# Altium PCB PCB_Radio.PcbDoc
Units mil, origin at the board's own origin, x right, y up, seen from the top; angles counter-clockwise.
Board outline 1520 x 1095 mil, 2 copper layers (Top Layer, Bottom Layer); 41 components, 38 nets, 138 pads, 117 vias.
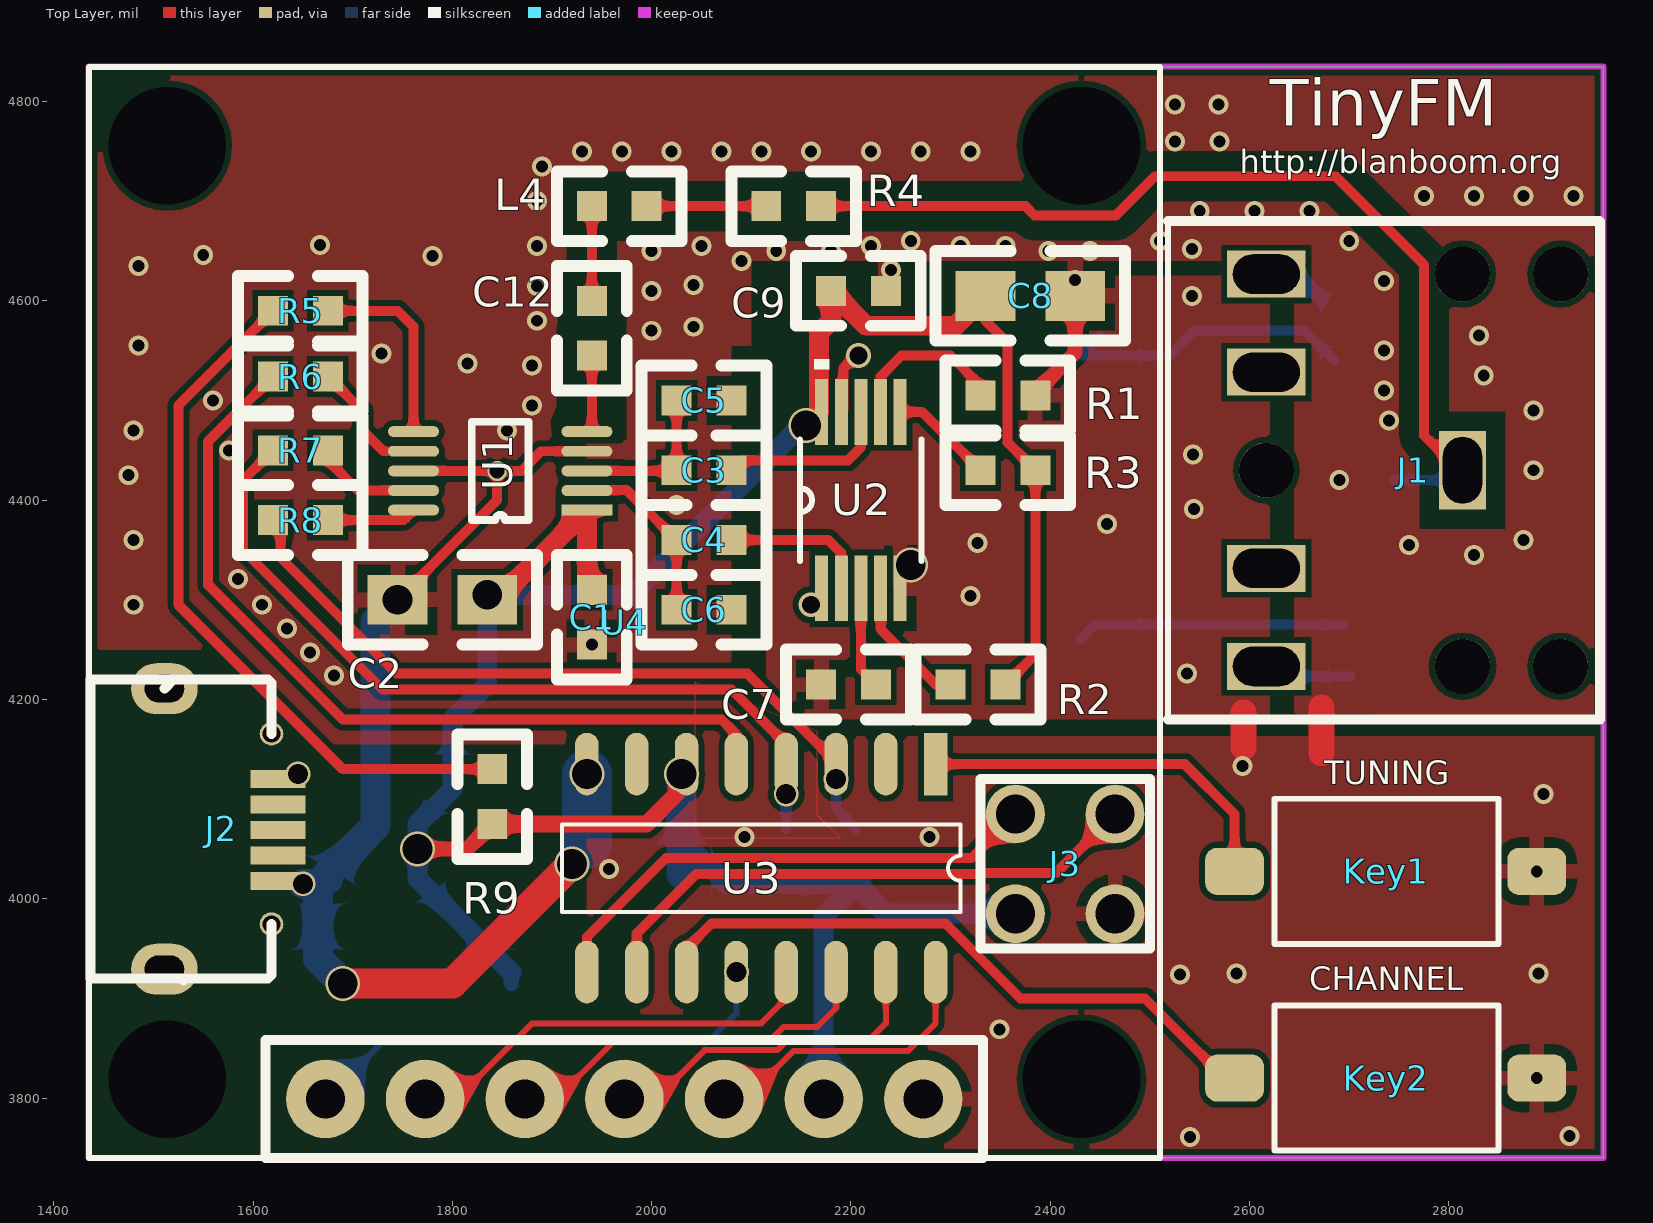
[diagram p0: Top Layer view]
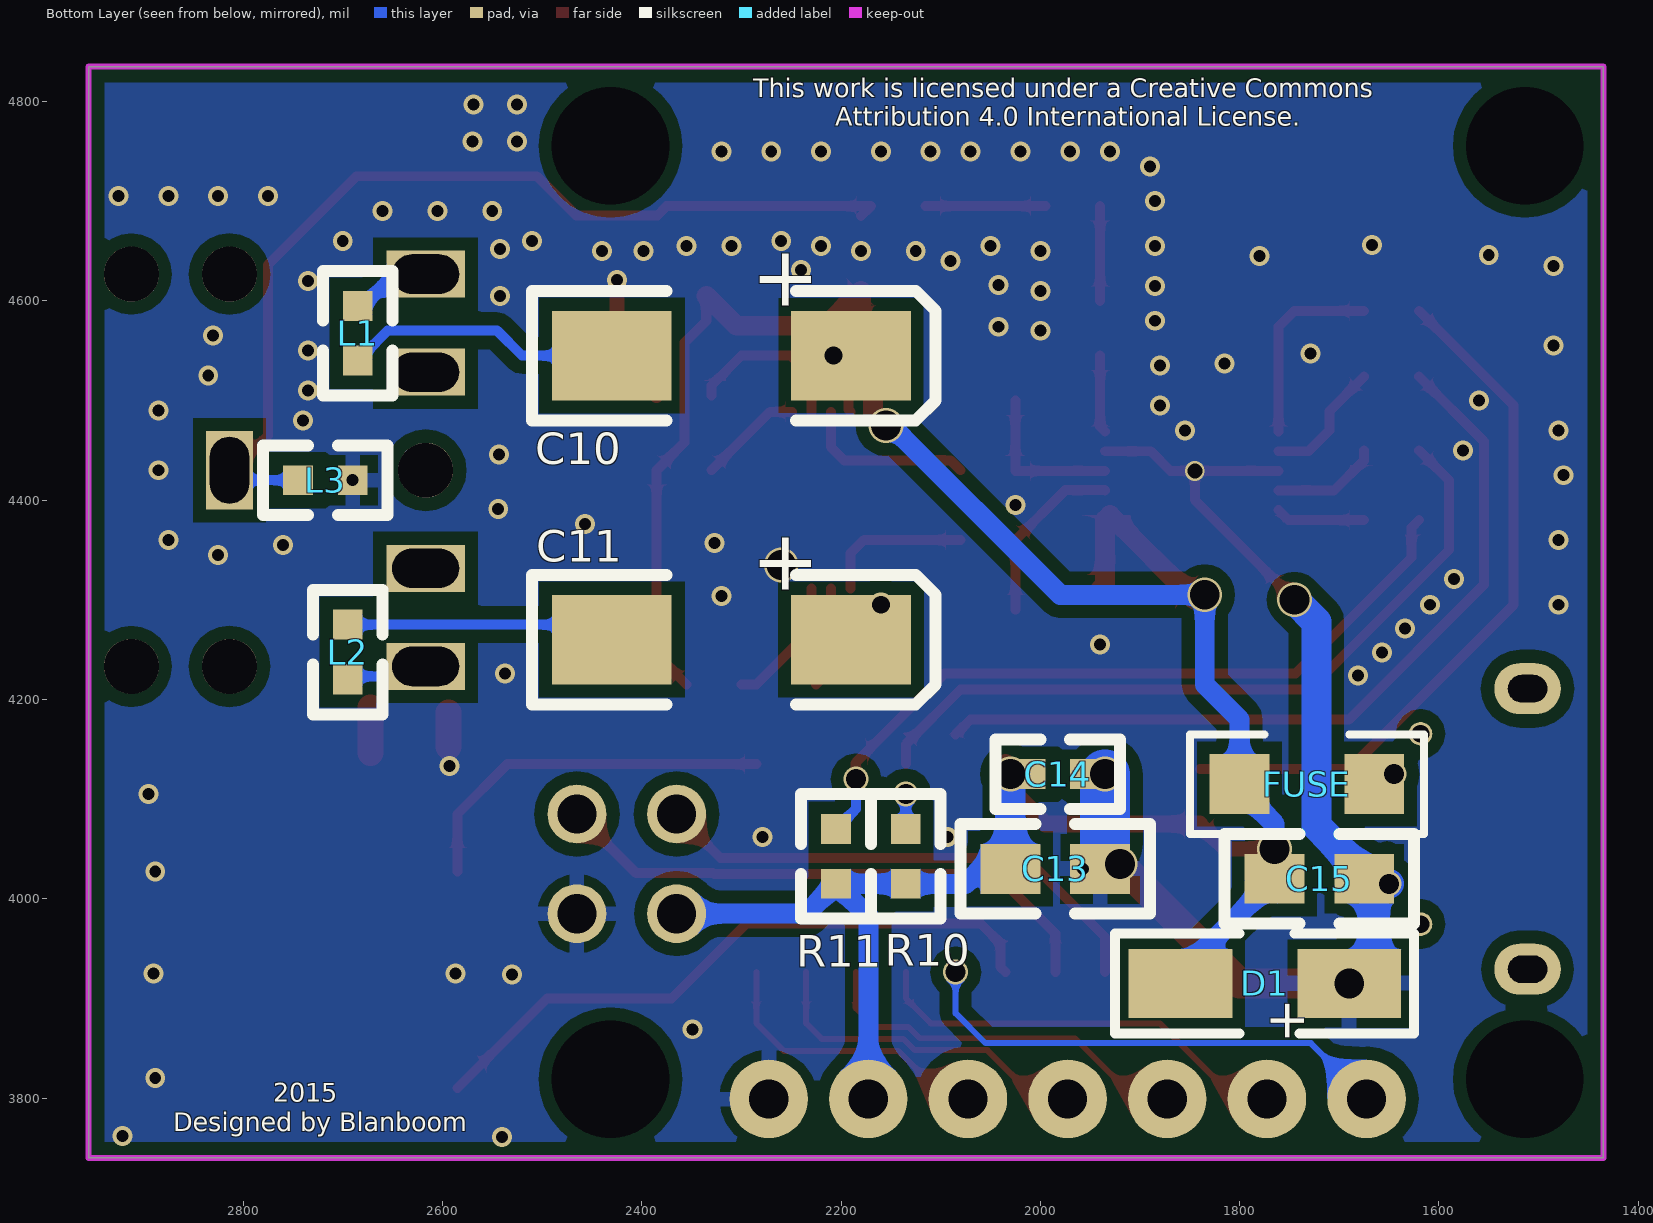
[diagram p1: Bottom Layer view, seen from below]

## Layer stack, top to bottom
Top Solder: solder mask 0.4, Solder Resist, Dk 3.5
Top Layer: signal copper 1.4
Dielectric 1: dielectric 12.6, FR-4, Dk 4.8
Bottom Layer: signal copper 1.4
Bottom Solder: solder mask 0.4, Solder Resist, Dk 3.5

## Board outline
1435,3740 2955,3740 2955,4835 1435,4835

## Design rules (kind name [scope] priority, off if disabled: settings)
Clearance Clearance_Bottom_Poly [(OnLayer('Bottom Layer') AND InNet('GND'))] p1: gap=13
Clearance Clearance_ant [(InNet('NetJ1_1') OR InNet('NetL4_2') OR InNet('NetC12_1')) vs InNet('GND')] p2: gap=20
Clearance [All] p3: gap=6
ComponentClearance [All] p1: gap=0 collisioncheckmode=3 verticalgap=0 showdistances=FALSE
PolygonConnect PolygonConnect_GND_Via [isvia] p1: connectstyle=Direct reliefconductorwidth=10 reliefentries=4 polygonreliefangle="90 Angle" airgapwidth=10
PolygonConnect [All] p2: connectstyle=Relief reliefconductorwidth=15 reliefentries=4 polygonreliefangle="90 Angle" airgapwidth=10
RoutingVias [All] p1: holewidth=28 width=50 viastyle="Through Hole" minholewidth=28 minwidth=50 maxholewidth=28 maxwidth=50
SolderMaskExpansion [All] p1: expansion=4
UnpouredPolygon [All] p1: allowunpoured=FALSE
Width [All] p1: maxlimit=100 minlimit=6 preferedwidth=10 minimp=50.000000 maximp=50.000000 favimp=50.000000
28 further rules are at their usual default settings.

## Components (designator, comment, footprint, x,y, rotation, side; value= is the part's Value field where it differs from the comment)
C1 "Cap" 0603 1940,4255 r90 top
C2 "Cap" 0805 1745,4300 r0 top
C3 "Cap" 0603 2025,4430 r0 top
C4 "Cap" 0603 2025,4360 r0 top
C5 "Cap" 0603 2080,4500 r180 top
C6 "Cap" 0603 2080,4290 r180 top
C7 "Cap" 0603 2225,4215 r180 top
C8 "Cap" 0805 2335,4605 r0 top
C9 "Cap" 0603 2180,4610 r0 top
C10 "Cap Pol2" 6032 2190,4545 r180 bottom
C11 "Cap Pol2" 6032 2190,4260 r180 bottom
C12 "Cap" 0603 1940,4600 r270 top
C13 "Cap" 0805 2030,4030 r180 bottom
C14 "Cap" 0603 2010,4125 r180 bottom
C15 "Cap" 0805 1675,4020 r0 bottom
D1 "M7" DO-214AC 1690,3915 r0 bottom
FUSE "1A 1206" 1206 1800,4115 r180 bottom
J1 "PHONEJACK 3F07" 3F07 2616.81,4430 r180 top locked
J2 "MicroUSB" MicroUSB 1635,4120 r270 top
J3 "Header4" HEADER4 2465,3985 r180 top
Key1 "Key" KEY 2585,4027.5 r0 top
Key2 "Key" KEY 2585,3820 r0 top
L1 "Inductor" 0603 2685,4540 r90 bottom
L2 "Inductor" 0603 2695,4275 r270 bottom
L3 "Inductor" 0603 2745,4420 r180 bottom
L4 "Inductor" 0603 1940,4695 r0 top
R1 "Res2" 0603 2385,4505 r180 top
R2 "Res2" 0603 2355,4215 r180 top
R3 "Res2" 0603 2385,4430 r180 top
R4 "Res2" 0603 2170,4695 r180 top
R5 "Res2" 0603 1675,4590 r180 top
R6 "Res2" 0603 1675,4524.06 r180 top
R7 "Res2" 0603 1675,4450 r180 top
R8 "Res2" 0603 1675,4380 r180 top
R9 "Res2" 0603 1840,4075 r90 top
R10 "Res2" 0603 2135,4015 r90 bottom
R11 "Res2" 0603 2205,4015 r90 bottom
U1 "QN8035" SOP10 1935,4390 r180 top
U2 "LM4811MM/NOPB" MUB10Am 2210,4400 r90 top
U3 "STC15W201S_SOP16_DIP16" SOP16 2285,4135 r270 top
U4 "OLED" OLED_0.96 2510,3740 r180 top locked

## Footprints (in the part's own frame and the unit in brackets; to place one, negate y for a bottom-side part, rotate by r counter-clockwise, add the part's x,y. Pads: shape width x height; smd on the part's side, far side on the other; paste and mask are expansions set on the pad)
3F07 [mm]
  round 1.4 hole 1.4: 0(-7.5,-5) 0(-7.5,5) 0(-5,5) 0(-5,-5) 0(0,0)
  rect 1.2x2 hole 1 slot 1.7 at 90 deg: 1(-5,0)
  rect 2x1.2 hole 1 slot 1.7 at 0 deg: 2(0,5) 3(0,2.5) 4(0,-2.5) 5(0,-5)
  silkscreen extent -8.51,-6.35 2.51,6.35
0603 [mil]
  rect 30x30 smd: 1(0,0) 2(55,0)
  silkscreen extent -35,-35 90,35
0805 [mil]
  rect 60x50 smd: 1(0,0) 2(90,0)
  silkscreen extent -50,-45 140,45
1206 [mil]
  rect 60x60 smd: 1(0,0) 2(135,0)
  silkscreen extent -50,-50 185,50
6032 [mil]
  rect 120x90 smd: 1(0,0) 2(-240,0)
  silkscreen extent -320,-65 85,65
DO-214AC [mm]
  rect 2.65x1.75 smd: 1(4.3,0) 3(0,0)
  silkscreen extent -1.65,-1.27 5.97,1.27
HEADER4 [mm]
  round 1.5 hole 1: 1(0,0) 2(2.54,0) 3(2.54,-2.54) 4(0,-2.54)
  silkscreen extent -0.89,-3.43 3.43,0.89
KEY [mm]
  rrect50% 1.5x1.2 smd: 1(0,0) 2(7.7,0)
  silkscreen extent 1.02,-1.85 6.73,1.85
MicroUSB [mm]
  rect 0.457x1.397 smd: 1(2.6,-0.254) 2(1.95,-0.254) 3(1.3,-0.254) 4(0.65,-0.254) 5(0,-0.254)
  round 0.6 hole 0.45: 5_2(-1.155,-0.42) 6(3.695,-0.42)
  oval 1.3x1.7 hole 0.7 slot 1 at 90 deg: 7(-2.305,-3.15) 8(4.845,-3.15)
  silkscreen extent -2.54,-5.03 5.13,-0.42
MUB10Am [mil]
  rect 66x13 smd: 1(-88.5,39.37) 2(-88.5,19.68) 3(-88.5,0) 4(-88.5,-19.68) 5(-88.5,-39.37) 6(88.5,-39.37) 7(88.5,-19.68) 8(88.5,0) 9(88.5,19.68) 10(88.5,39.37)
  silkscreen extent -61,-61 142,61
OLED_0.96 [mm]
  round 0 hole 3: 0(2,-2) 0(2,-25.8) 0(25.3,-2) 0(25.3,-25.8)
  round 2 hole 1: 1(6.03,-1.5) 2(8.57,-1.5) 3(11.11,-1.5) 4(13.65,-1.5) 5(16.19,-1.5) 6(18.73,-1.5) 7(21.27,-1.5)
  silkscreen extent 0,-27.8 27.3,0
SOP10 [mm]
  rect 1.3x0.28 smd: 1(0,0)
  oval 1.3x0.28 smd: 2(0,-0.5) 3(0,-1) 4(0,-1.5) 5(0,-2) 6(4.42,-2) 7(4.42,-1.5) 8(4.42,-1) 9(4.42,-0.5) 10(4.42,0)
  silkscreen extent 1.48,-2.25 2.94,0.25
SOP16 [mm]
  rect 1.6x0.6 smd: 1(0,0)
  oval 1.6x0.6 smd: 2(0,-1.27) 3(0,-2.54) 4(0,-3.81) 5(0,-5.08) 6(0,-6.35) 7(0,-7.62) 8(0,-8.89) 9(5.3,-8.89) 10(5.3,-7.62) 11(5.3,-6.35) 12(5.3,-5.08) 13(5.3,-3.81) 14(5.3,-2.54) 15(5.3,-1.27) 16(5.3,0)
  silkscreen extent 1.53,-9.53 3.77,0.64

## Part data
C1 C2 C3 C4 C5 C6 C7 C8 C9 C12 C13 C14 C15: "Capacitor"
C10 C11: "Polarized Capacitor (Axial)"
D1: library part Diode, "Default Diode"
FUSE: library part "Fuse 1", "Fuse"
J1: library part "PHONEJACK STEREO SW"
J2 U2: "Imported"
R1 R2 R3 R4 R5 R6 R7 R8 R9 R10 R11: "Resistor"

## Via types
v1: diameter 20, hole 12, Top Layer to Bottom Layer, 100 vias
v2: diameter 35, hole 30, Top Layer to Bottom Layer, 9 vias
v3: diameter 25, hole 20, Top Layer to Bottom Layer, 5 vias
v4: diameter 25, hole 18, Top Layer to Bottom Layer, 2 vias
v5: diameter 20, hole 15, Top Layer to Bottom Layer, 1 vias

## Nets (pads, with @x,y where several pads share a name; then routed paths per layer and width w, separated by ;. In a path a pad name is that pad's centre, name@x,y a point inside that pad or via, vN(x,y) a via of type N, cw(c..) or ccw(c..) an arc to the next point about the centre after c; other vN are vias at no path point)
CLK: R6.2 U3.5 | length 828.1
  Top Layer w10: R6.2 1555,4459.06 1555,4315 1690,4180 2070,4180 U3.5@2085,4165
GND: C1.1 C2.1 C5.1 C6.1 C7.2 C8.2 C9.2 C13.2 C14.2 C15.1 D1.3 J2.1 J3.1 Key1.2 Key2.2 L3.2 R1.1 U1.4 U1.8 U2.5 U3.8 U4.1 | length 1317.5
  Top Layer w10: v2(1745,4300) 1845,4400 v5(1845,4429.37) ; U1.8 v5(1845,4429.37) ; U1.4 1889.06,4449.06 1869.37,4429.37 v5(1845,4429.37)
  Top Layer w15: R1.1 2385,4508 2425,4548 C8.2
  Top Layer w26: 2594,4152 2594,4187 ; 2672,4146 2672,4192
  Top Layer w30: v2(1690,3915) 1800,3915 v2(1920,4035)
  Bottom Layer w30: v3(1650,4015) 1660,4015 1665,4010 1665,3940 D1.3@1680,3925 ; C15.1 1675,4025.4 1723,4073.4 1723,4278 v2(1745,4300)
  Bottom Layer w50: 1935,4055 v2(1935,4125)
  other v1: 2540,3761 2921,3762 2888.15,3820 2349,3869 2530,3924 2587,3925 2890,3925 2888.15,4027.5 1957,4030 2093,4062 2279,4062 2895,4105 2593,4133 1681,4224 2537,4226 1657,4247 1940,4255 1634,4271 1480,4295 1609,4295 2320,4304 1585,4321 2825,4345 2760,4355 2327,4357 1480,4360 2875,4360 2457,4376 2544,4391 2025,4395 2690,4420 1475,4425 2885,4430 2543,4446 1576,4450 1480,4470 1855,4470 2740,4480 2885,4490 1880,4495 1560,4500 2735,4510 2835,4525 1880,4535 1815,4537 1729,4547 2735,4550 1485,4555 2830,4565 2000,4570 2042,4574 1885,4580 2542,4605 2000,4610 1885,4615 2042,4616 2735,4620 2425,4621 2240,4631 1485,4635 2090,4640 1780,4645 1550,4646 2000,4650 2125,4650 2180,4650 2398,4650 2440,4650 2542,4652 1885,4655 2050,4655 2220,4655 2310,4655 2355,4655 1667,4656 2260,4660 2510,4660 2700,4660 2550,4690 2605,4690 2660,4690 1885,4700 2775,4705 2825,4705 2875,4705 2925,4705 1890,4735 1930,4750 1970,4750 2020,4750 2070,4750 2110,4750 2160,4750 2220,4750 2270,4750 2320,4750 2525,4760 2570,4760 2525,4797 2569,4797
  other v2: 2260,4335
INT: R5.2 R9.2 | length 717.7
  Top Layer w10: R5.2 1525,4495 1525,4295 1690,4130 R9.2
KEY1: Key1.1 U3.1 | length 378.2
  Top Layer w10: U3.1 2535,4135 2585,4085 Key1.1
KEY2: Key2.1 U3.11 | length 652.4
  Top Layer w10: U3.11 2040,3931.34 2040,3955 2060,3975 2295,3975 2370,3900 2495,3900 Key2.1@2585,3810
NetC3_1: C3.1 C5.2 U1.3 | length 160
  Top Layer w10: U1.3 C3.1@2025,4429.37 ; C3.1 C5.2
NetC3_2: C3.2 U2.8 | length 175
  Top Layer w10: C3.2 2090,4440 2196.87,4440 2210,4453.13 U2.8
NetC4_1: C4.1 C6.2 U1.2 | length 180.8
  Top Layer w10: U1.2 1935.32,4410 1975,4410 C4.1 C6.2
NetC4_2: C4.2 U2.2 | length 151.1
  Top Layer w10: C4.2 2177.19,4360 2190.32,4346.87 U2.2
NetC7_1: C7.1 U2.3 | length 102.7
  Top Layer w10: U2.3 2210,4230 C7.1
NetC10_1: C10.1 U2.9 | length 65.1
  Top Layer w10: U2.9 2192.5,4490.69 2192.5,4532.5 2205,4545 v4(2207.5,4545)
NetC10_2: C10.2 L1.1 | length 306.1
  Bottom Layer w10: C10.2@2450,4565 C10.2 2520,4545 2545,4570 2655,4570 L1.1
NetC11_1: C11.1 U2.1
  other v4: 2160,4295
NetC11_2: C11.2 L2.1 | length 271.2
  Bottom Layer w10: C11.2 2445,4275 L2.1
NetC12_1: C12.1 L4.1 | length 95
  Top Layer w10: C12.1 L4.1
NetC12_2: C12.2 U1.5 | length 78.3
  Top Layer w10: U1.5 1940,4473.74 C12.2
NetFUSE_2: FUSE.2 J2.5
  other v3: 1645,4125
NetJ1_1: J1.1 L3.1 R4.1 | length 974.4
  Top Layer w10: R4.1@2180,4685 R4.1 2375,4695 2384.31,4685.69 2465.69,4685.69 2505,4725 2686.24,4725 2775.1,4636.14 2775.1,4464.9 2811.85,4428.15 J1.1@2811.85,4420
  Bottom Layer w10: L3.1 J1.1@2811.85,4420
NetJ1_2: J1.2 L2.2 | length 86.9
  Bottom Layer w10: J1.2@2615,4223.15 L2.2@2701.85,4223.15
NetJ1_5: J1.5 L1.2 | length 65.8
  Bottom Layer w13: J1.5 2648.15,4626.85 L1.2@2672.5,4602.5
NetL4_2: L4.2 R4.2 | length 120
  Top Layer w10: L4.2 R4.2
NetR1_2: R1.2 U2.7 | length 166.9
  Top Layer w10: U2.7 2229.68,4523.87 2250.81,4545 2300,4545 2330,4515 R1.2
NetR2_2: R2.2 U2.4 | length 134.6
  Top Layer w10: U2.4 2229.68,4285 2230,4285 2230,4270 2285,4215 R2.2
NetR3_2: R3.2 U2.6 | length 104.9
  Top Layer w10: U2.6 2271.5,4488.5 R3.2
NetR5_1: R5.1 U1.6 | length 197.9
  Top Layer w10: R5.1 1745,4590 1760.98,4574.02 U1.6
NetR6_1: R6.1 U1.7 | length 128.2
  Top Layer w10: R6.1 1710,4489.06 1710,4470 1730.94,4449.06 U1.7
NetR7_1: R7.1 U1.9 | length 108.5
  Top Layer w10: R7.1 1675,4440 1705.32,4409.69 U1.9
NetR8_1: R8.1 U1.10 | length 90.1
  Top Layer w10: R8.1 1750.98,4380 U1.10
OLED_CS: U3.12 U4.7 | length 489.3
  Bottom Layer w6: U4.7 1728.54,3855 2055,3855 2085,3885 v3(2085,3926.34)
OLED_D0: U3.16 U4.3 | length 295.2
  Top Layer w6: U4.3 2094.06,3799.06 2142.43,3847.43 2257.43,3847.43 2285,3875 U3.16
OLED_D1: U3.15 U4.4 | length 351.1
  Top Layer w6: U4.4 2000,3799.06 2000,3794.86 2053.14,3848 2126.03,3848 2137.45,3859.43 2219.43,3859.43 2235,3875 U3.15
OLED_DC: U3.13 U4.6 | length 436.5
  Top Layer w6: U4.6 1800,3799.06 1800,3794.86 1880.14,3875 2110,3875 2135,3900 U3.13
OLED_RES: U3.14 U4.5 | length 413.6
  Top Layer w6: U4.5 1885,3799.06 1885,3779.86 1965.14,3860 2121.06,3860 2132.48,3871.43 2166.43,3871.43 2185,3890 U3.14
RX: J3.3 U3.9 | length 516.3
  Top Layer w10: U3.9 1935,3961.5 2014.5,4041 2321,4041 J3.3
SCL: R7.2 R10.2 U3.4 | length 793.2
  Top Layer w10: R7.2 1590,4420 1590,4350 1730,4210 2080,4210 2135,4155 U3.4
  Bottom Layer w10: R10.2 v3(2135,4105)
SDA: R8.2 R11.2 U3.3 | length 763.5
  Top Layer w10: R8.2 1627.66,4372.34 1627.66,4342.34 1744,4226 2095.94,4226 U3.3@2185,4136.94 ; U3.3@2185,4116.94 U3.3@2185,4136.94 ; U3.3 U3.3@2185,4136.94
  Bottom Layer w10: v3(2185,4120) 2185,4090 R11.2
TX: J3.4 U3.10 | length 591.4
  Top Layer w10: U3.10 1985,3965 2045,4025 2327.63,4025 2328.63,4026 2406,4026 J3.4 J3.4@2442,4085
VCC: C1.2 C2.2 C8.1 C9.1 C13.1 C14.1 C15.2 D1.1 FUSE.1 J3.2 R2.1 R3.1 R9.1 R10.1 R11.1 U1.1 U2.10 U3.6 U4.2 | length 2775.6
  Top Layer w10: C8.1 2335,4580 2357,4558 2357,4458 R3.1 2385,4245 R2.1
  Top Layer w15: v2(1765,4050) 1815,4050 R9.1
  Top Layer w17: R9.1 1995,4075 2025,4105 U3.6@2025,4125
  Top Layer w20: C2.2 1845,4300 1930,4385 1935,4380 1935,4315 C1.2 ; U3.6@2025,4125 U3.6 ; U2.10@2167.82,4488.5 2167.82,4567.81 2180,4580 C9.1 2215,4575 2305,4575 C8.1
  Bottom Layer w15: FUSE.1@1800,4110 FUSE.1 ; D1.1 D1.1@1859.29,3925.71
  Bottom Layer w20: FUSE.1@1800,4110 1765,4075 v2(1765,4050) C15.2 D1.1@1859.29,3925.71 ; FUSE.1 1800,4180 1835,4215 v2(1835,4305) 1980,4305 v2@2152.5,4477.5 ; C13.1@2047.5,4042.5 2075,4015 R10.1 R11.1 ; U4.2 2172.6,3982.6 R11.1 ; J3.2 2235,3985 R11.1
  Bottom Layer w30: C13.1@2030,4025 C13.1 v2(2030,4125)
  other v2: 2155,4475
pads on no net: J1.0 J1.3 J1.4 J2.2 J2.3 J2.4 J2.5_2 J2.6 J2.7 J2.8 U3.2 U3.7 U4.0

## Polygon pours and split planes (outlines as drawn)
no net on Top Layer "Top2" (solid, remove dead copper, shelved, pour order 10): 2043,4217 2043,4061 2189,4061 2166,4084 2166,4168
GND on Top Layer "Top2" (solid, remove dead copper, pour order 16): 2115,4625 2614.96,4625 2616.81,4626.85 2620,4623.66 2620,4180 2120,4180 2115,4185
GND on Top Layer "Top2" (solid, remove dead copper, pour order 14): 2726.24,4685 2725,4683.76 2725,4180 2950,4180 2955,4185 2955,4685
GND on Top Layer "Top2" (solid, remove dead copper, pour order 13): 2090,4835 2090,4660 2090,4640 2955,4640 2955,4835
GND on Top Layer "Top2" (solid, remove dead copper, pour order 12): 1955,4835 1955,4555 2100,4555 2100,4835
GND on Top Layer "Bottom Layer-No Net" (solid, remove dead copper, pour order 11): 1435,4835 1435,4260 1440,4255 1445,4250 1540,4250 1575,4250 1670,4155 2080,4155 2080,4255 2080,4835
GND on Top Layer "Top2" (solid, remove dead copper, pour order 17): 2955,3740 1590,3740 1590,3855 1935,3855 1935,4200 2126,4200 2126,4163 2955,4163
GND on Top Layer "Top2" (solid, remove dead copper, pour order 15): 2645,4660 2730,4660 2730,4185 2650,4185 2645,4180
GND on Bottom Layer "Top2" (solid, remove dead copper, pour order 18): 1435,3740 2955,3740 2955,4835 1440,4835 1435,4840

## Keep-outs
Keep-Out Layer:
  the board outline again, w6

## Other copper
Top Layer:
  pour cut-out: 1904,4575 1904,4493.8 1898.08,4479.5 1900,4460 1975,4460 1975,4575

## Silkscreen, mask and mechanical layers (free items; w line width, h text height)
Top Overlay:
  text "TinyFM" at 2620,4760 h80
  text "http://blanboom.org" at 2590,4720 h40
  text "TUNING" at 2675,4107 h40
  text "CHANNEL" at 2660,3900 h40
Bottom Overlay:
  text "This work is licensed under a Creative Commons" at 2288,4798 h32
  text "Attribution 4.0 International License." at 2206,4769 h32
  text "2015" at 2770,3790 h32
  text "Designed by Blanboom" at 2870,3760 h32

## Text inside footprints (layer, text, board x,y; h text height)
C10: Bottom Overlay "+" at 2290,4595 h60
C11: Bottom Overlay "+" at 2290,4310 h60
D1: Bottom Overlay "+" at 1735,3855 h39.37 r270